# Altium PCB ADCSHub.PcbDoc
Units mil, origin at the board's own origin, x right, y up, seen from the top; angles counter-clockwise.
Board outline 3625 x 3400 mil, 2 copper layers (Component Side, Bottom Layer), stack 65.756 mil thick; 31 components, 29 nets, 226 pads, 47 vias.
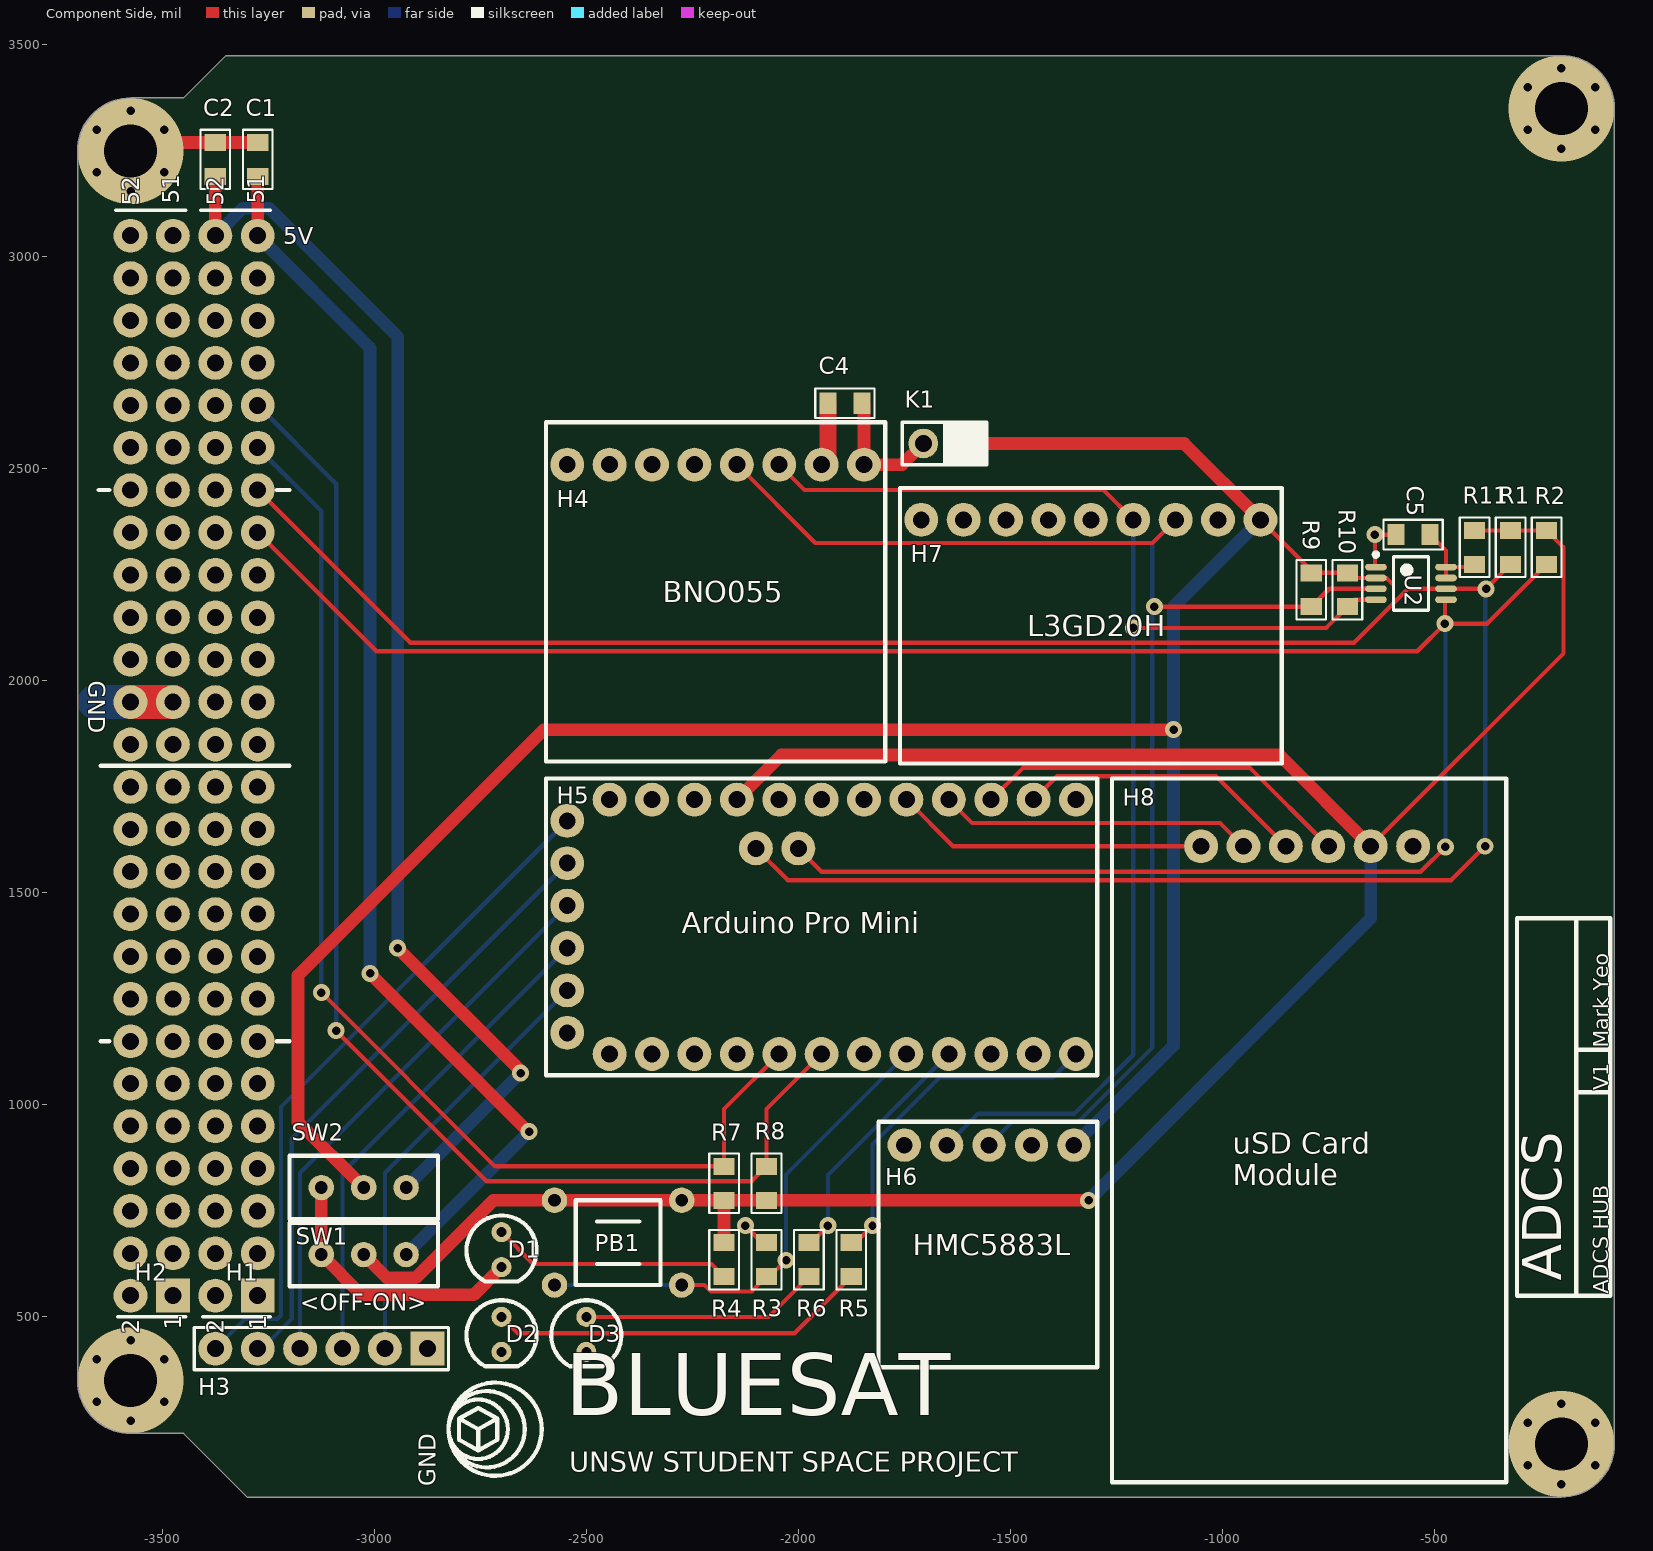
[diagram p0: Component Side view]
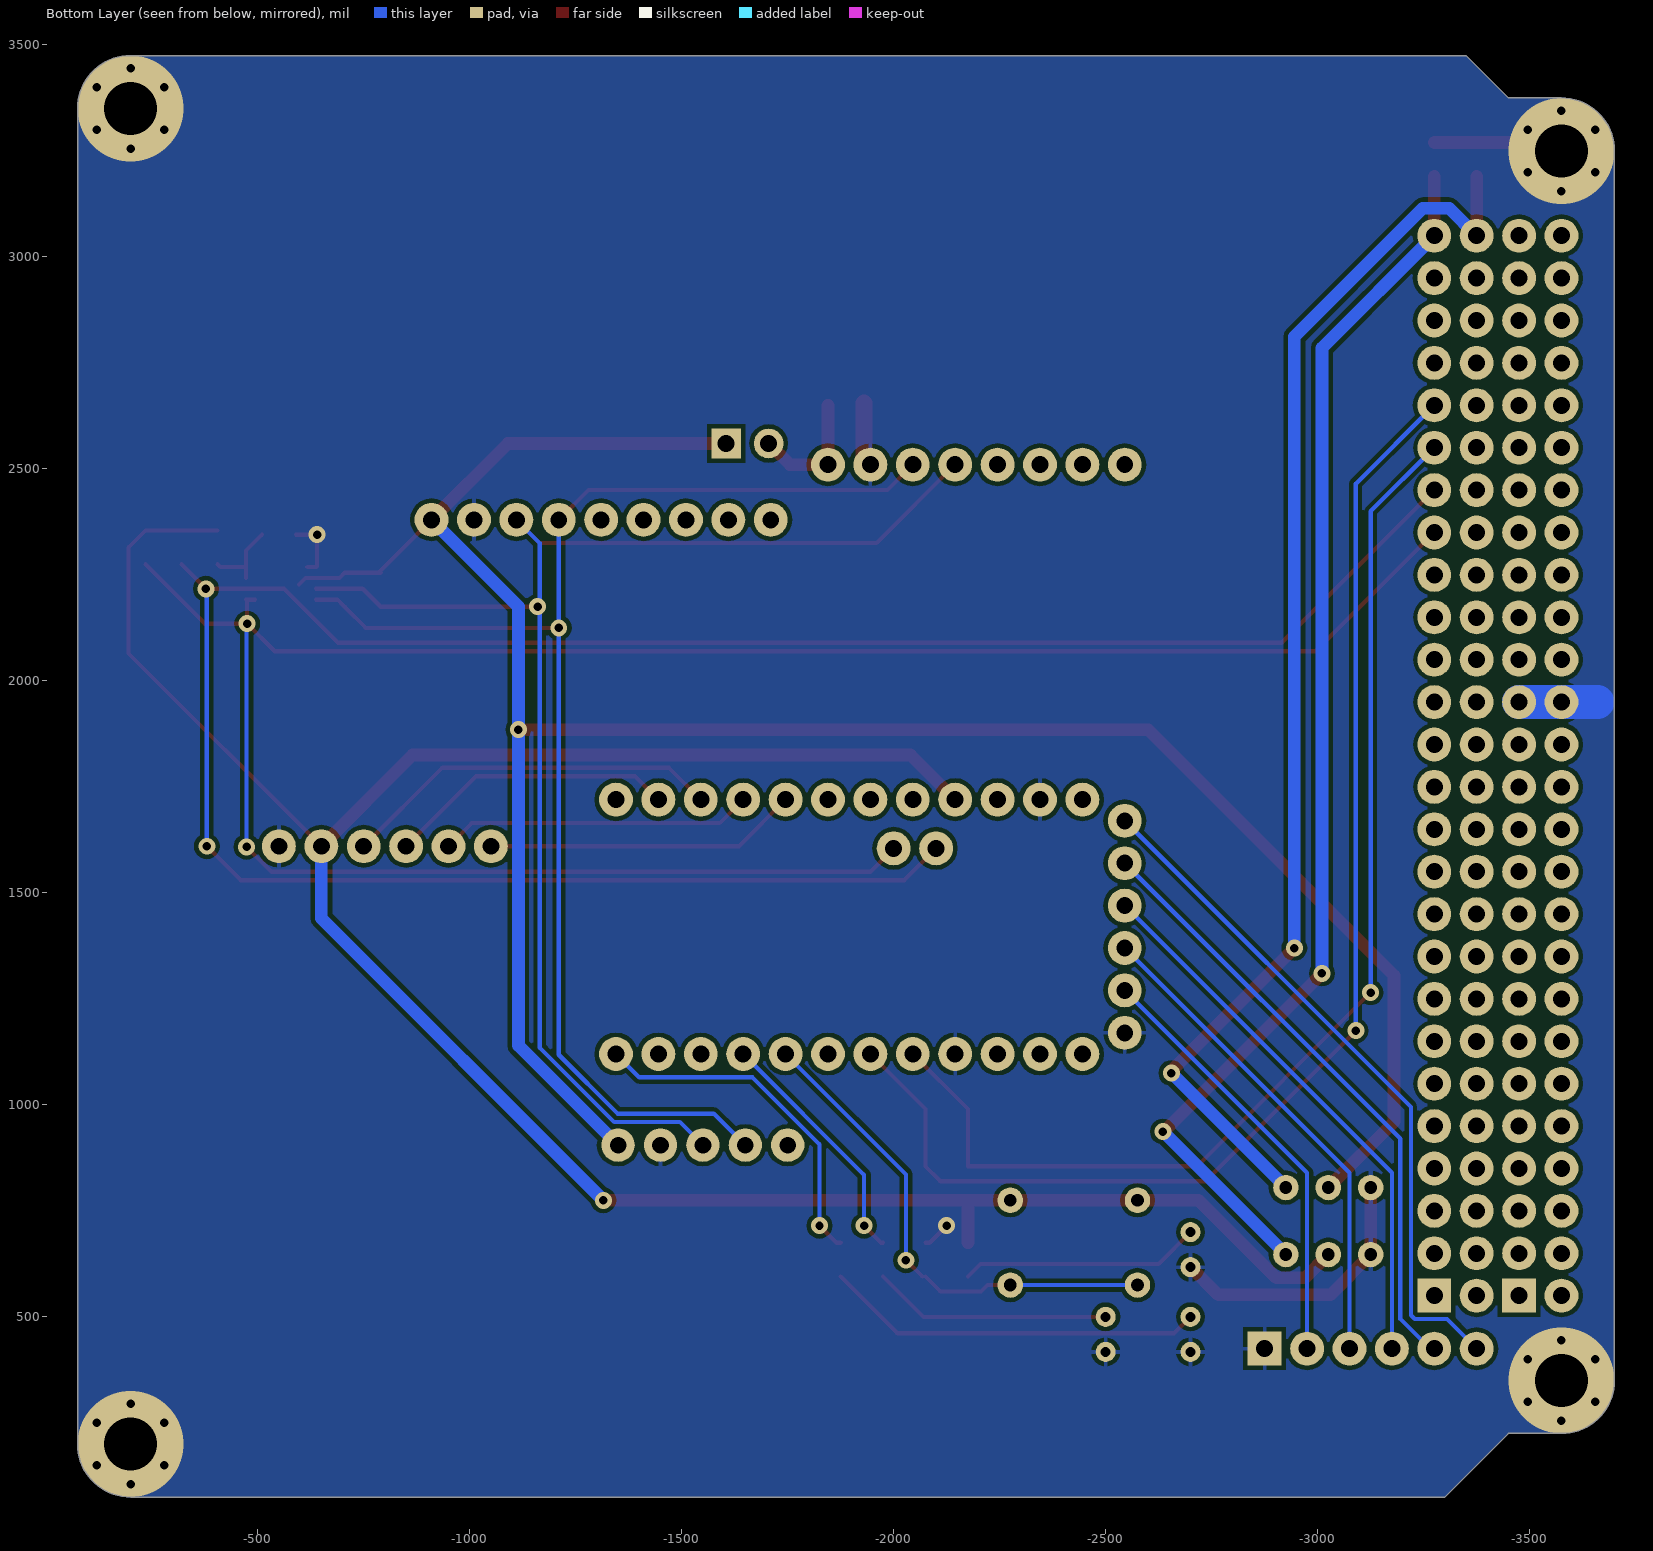
[diagram p1: Bottom Layer view, seen from below]

## Layer stack, top to bottom
Top Solder: solder mask 0.394, Solder Resist, Dk 3.5
Component Side: signal copper 1.378
Dielectric 1: core 63, FR-4, Dk 4.2
Bottom Layer: signal copper 1.378
Solder Side: solder mask 0.394, Solder Resist, Dk 3.5

## Board outline
-3575,225 cw(c-3575,350) -3700,350 -3700,3250 cw(c-3575,3250) -3575,3375 -3450,3375 -3350,3475 -200,3475 cw(c-200,3350) -75,3350 -75,200 cw(c-200,200) -200,75 -3300,75 -3450,225

## Design rules (kind name [scope] priority, off if disabled: settings)
Clearance [All] p1: gap=10
Clearance "Clearance (Same Net)" [All] p2: gap=0 except(8: SMDPad-SMDPad SMDPad-THPad SMDPad-Via)
ComponentClearance [All] p1: gap=0 collisioncheckmode=3 verticalgap=0 showdistances=FALSE
HoleSize HoleSize_1 [All] p1: absolutevalues=TRUE maxlimit=100000 minlimit=24 maxpercent=80.000 minpercent=20.000
HoleSize [All] p2: absolutevalues=TRUE maxlimit=100 minlimit=1 maxpercent=80.000 minpercent=20.000
HoleToHoleClearance mdViaViaSameLayer [All] p1: gap=8 allowstackedmicrovias=TRUE
HoleToHoleClearance [All] p2: gap=10 allowstackedmicrovias=TRUE
PasteMaskExpansion mlMinCreamFrame [All] p1: expansion=0
PasteMaskExpansion [All] p2: expansion=0
PlaneConnect PlaneConnect_1 [All] p1: planeconnectstyle=Relief reliefexpansion=20 reliefentries=4 reliefconductorwidth=10 reliefairgap=10
PlaneConnect PlaneConnect_2 [IsVia AND InNet('GND')] p2: planeconnectstyle=Direct reliefexpansion=20 reliefentries=4 reliefconductorwidth=10 reliefairgap=10
PolygonConnect ThermalVias [IsVia] p1: connectstyle=Direct reliefconductorwidth=10 reliefentries=4 polygonreliefangle="90 Angle" airgapwidth=10
PolygonConnect [All] p2: connectstyle=Relief reliefconductorwidth=10 reliefentries=4 polygonreliefangle="90 Angle" airgapwidth=10
RoutingVias [All] p1: holewidth=28 width=50 viastyle="Through Hole" minholewidth=28 minwidth=50 maxholewidth=28 maxwidth=50
SilkToSilkClearance [All] p1 off: silktosilkclearance=10
SilkToSolderMaskClearance [IsPad] p1 off: minsilkscreentomaskgap=10 clearancetoexposedcopper=TRUE
SolderMaskExpansion mlMinStopFrame [All] p1: expansion=4
SolderMaskExpansion [All] p2: expansion=4
Width Width_1 [All] p1: maxlimit=100000 minlimit=6 preferedwidth=10
Width [All] p2: maxlimit=10 minlimit=8 preferedwidth=10
23 further rules are at their usual default settings.

## Components (designator, comment, footprint, x,y, rotation, side; value= is the part's Value field where it differs from the comment)
C1 "100nF" 0805C-TBD -3275,3200 r90 top
C2 "100nF" 0805C-TBD -3375,3200 r90 top
C4 "10uF" 0805C-GENERIC -1860,2655 r180 top
C5 "10uF" 0805C-GENERIC -520,2345 r180 top
D1 "LED" LED -2700,700 r0 top
D2 "LED" LED -2700,500 r0 top
D3 "LED" LED -2500,500 r0 top
H1 "26X2 Header" "26X2 Header" -3275,550 r90 top
H2 "26X2 Header" "26X2 Header" -3475,550 r90 top
H3 "Header 6" HDR1X6 -2875,425 r180 top
H4 "BNO055" BNO055 -1845,2510 r270 top
H5 "Arduino Pro Mini" "Arduino Pro Mini" -2445,1120 r90 top
H6 "HMC5883L" HMC5883L -1350,905 r270 top
H7 "L3GD20H" L3GD20H -910,2380 r270 top
H8 "uSD Card Module" "uSD Card Module" -1050,1610 r90 top
K1 "HEADER-1X2" HEADER-1X2 -1605,2560 r270 top
PB1 "PushButton" PushButton -2575,575 r0 top
R1 "4K7" 0805R-4K7 -320,2345 r270 top
R2 "4K7" 0805R-4K7 -235,2345 r270 top
R3 "4K7" 0805R-4K7 -2075,605 r90 top
R4 "150R" 0805R-150 -2175,665 r270 top
R5 "150R" 0805R-150 -1875,665 r270 top
R6 "150R" 0805R-150 -1975,665 r270 top
R7 "4K7" 0805R-4K7 -2175,785 r90 top
R8 "4K7" 0805R-4K7 -2075,785 r90 top
R9 "4K7" 0805R-4K7 -790,2245 r270 top
R10 "4K7" 0805R-4K7 -705,2245 r270 top
R11 "200K" 0805R-4K7 -405,2285 r90 top
SW1 "ToggleSwitch" SWITCHFOOTPRINT -2925,647 r90 top
SW2 "ToggleSwitch" SWITCHFOOTPRINT -2925,805 r90 top
U2 "PCA9306" PCA9306 -555,2230 r0 top

## Footprints (in the part's own frame and the unit in brackets; to place one, negate y for a bottom-side part, rotate by r counter-clockwise, add the part's x,y. Pads: shape width x height; smd on the part's side, far side on the other; paste and mask are expansions set on the pad)
"26X2 Header" [mil]
  rect 80x80 hole 40: 1(0,0)
  round 80 hole 40: 2(0,100) 3(100,0) 4(100,100) 5(200,0) 6(200,100) 7(300,0) 8(300,100) 9(400,0) 10(400,100) 11(500,0) 12(500,100) 13(600,0) 14(600,100) 15(700,0) 16(700,100) 17(800,0) 18(800,100) 19(900,0) 20(900,100) 21(1000,0) 22(1000,100) 23(1100,0) 24(1100,100) 25(1200,0) 26(1200,100) 27(1300,0) 28(1300,100) 29(1400,0) 30(1400,100) 31(1500,0) 32(1500,100) 33(1600,0) 34(1600,100) 35(1700,0) 36(1700,100) 37(1800,0) 38(1800,100) 39(1900,0) 40(1900,100) 41(2000,0) 42(2000,100) 43(2100,0) 44(2100,100) 45(2200,0) 46(2200,100) 47(2300,0) 48(2300,100) 49(2400,0) 50(2400,100) 51(2500,0) 52(2500,100)
  silkscreen extent -50,-30 2560,135, body extent -55,-47 2555,150, height 335
0805C-GENERIC [mil] "CAPACITOR 0805"
  rect 40x50 smd: 1(-10,0) 2(70,0)
  silkscreen extent -40,-35 100,35, body extent -11,-25 70,25, height 26
0805C-TBD [mil] "CAPACITOR 0805"
  rect 40x50 smd: 1(-10,0) 2(70,0)
  silkscreen extent -40,-35 100,35, body extent -11,-25 70,25, height 26
0805R-4K7 [mil] "RESISTOR 0805"
  rect 40x50 smd: 1(-10,0) 2(70,0)
  silkscreen extent -40,-35 100,35, body extent -11,-25 70,25, height 27
0805R-150 [mil] "RESISTOR 0805"
  rect 40x50 smd: 1(-10,0) 2(70,0)
  silkscreen extent -40,-35 100,35, body extent -11,-25 70,25, height 27
"Arduino Pro Mini" [mil]
  round 80 hole 40: 1(0,0) 2(0,-100) 3(0,-200) 4(0,-300) 5(0,-400) 6(0,-500) 7(0,-600) 8(0,-700) 9(0,-800) 10(0,-900) 11(0,-1000) 12(0,-1100) 13(600,0) 14(600,-100) 15(600,-200) 16(600,-300) 17(600,-400) 18(600,-500) 19(600,-600) 20(600,-700) 21(600,-800) 22(600,-900) 23(600,-1000) 24(600,-1100) 25(485,-345) 26(485,-445) 27(50,100) 28(150,100) 29(250,100) 30(350,100) 31(450,100) 32(550,100)
  silkscreen extent -50,-1150 650,150
BNO055 [mil]
  round 80 hole 40: 1(0,0) 2(0,-100) 3(0,-200) 4(0,-300) 5(0,-400) 6(0,-500) 7(0,-600) 8(0,-700)
  silkscreen extent -100,-750 700,50
HDR1X6 [mil] "Connector; Header; 6 Position"
  rect 80x80 hole 40: 1(0,0)
  round 80 hole 40: 2(100,0) 3(200,0) 4(300,0) 5(400,0) 6(500,0)
  silkscreen extent -50,-50 550,50
HEADER-1X2 [mil]
  rect 70x70 hole 40: 1(0,0)
  round 70 hole 40: 2(0,-100)
  silkscreen extent -50,-150 50,50, body extent -50,-150 50,50, height 470
HMC5883L [mm]
  round 2 hole 1: 1(0,0) 2(0,-2.54) 3(0,-5.08) 4(0,-7.62) 5(0,-10.16)
  silkscreen extent -1.4,-11.7 13.3,1.4
L3GD20H [mil]
  round 80 hole 40: 1(0,0) 2(0,-100) 3(0,-200) 4(0,-300) 5(0,-400) 6(0,-500) 7(0,-600) 8(0,-700) 9(0,-800)
  silkscreen extent -75,-850 575,50
LED [mm]
  round 1.2 hole 0.6: 1(0,0) 2(0,-2.1)
  silkscreen extent -2.1,-2.96 2.1,1
PCA9306 [mm] "Dual Bidirectional I2C Voltage Shifter"
  oval 1.3x0.4 smd: 1(-2.1,0.975) 2(-2.1,0.325) 3(-2.1,-0.325) 4(-2.1,-0.975) 5(2.1,-0.975) 6(2.1,-0.325) 7(2.1,0.325) 8(2.1,0.975)
  silkscreen extent -2.22,-1.6 1.05,1.85, body extent -2,-1.6 2,1.6, height 1.4
PushButton [mil]
  round 60 hole 30: 5(0,0) 6(300,0) 7(0,200) 8(300,200)
  silkscreen extent 50,0 250,200, body extent 50,0 250,200, height 300
SWITCHFOOTPRINT [mil]
  round 60 hole 30: 2(0,0) 3(0,100) 4(0,200)
  silkscreen extent -75,-75 75,275, body extent -75,-75 75,275, height 300
"uSD Card Module" [mil]
  round 80 hole 40: 1(0,0) 2(0,-100) 3(0,-200) 4(0,-300) 5(0,-400) 6(0,-500)
  silkscreen extent -1500,-720 160,210

## Part data
C1 C2: library part 0805C-100nF-25V-X7R-MUR, "CAPACITOR 0805 CERAMIC"
C4 C5: library part 0805C-10UF-16V-X5R-TDK, "CAPACITOR 0805 CERAMIC"
D1 D2 D3: "Small LED"
H3: "Header, 6-Pin"
H4: "Accel+Gyro+Mag"
H6: "Magnetometer"
H7: "Gyroscope"
R1 R2 R3 R7 R8 R9 R10 R11: library part 0805R-4K7, "RESISTOR 0805 1/4 WATT THIN FILM"
R4 R5 R6: library part 0805R-150, "RESISTOR 0805 1/4 WATT THIN FILM"
U2: "Dual Bidirectional I2C Voltage Level Translator"

## Via types
v1: diameter 40, hole 20, Component Side to Bottom Layer, 43 vias
v2: diameter 250, hole 125, Component Side to Bottom Layer, 4 vias

## Nets (pads, with @x,y where several pads share a name; then routed paths per layer and width w, separated by ;. In a path a pad name is that pad's centre, name@x,y a point inside that pad or via, vN(x,y) a via of type N, cw(c..) or ccw(c..) an arc to the next point about the centre after c; other vN are vias at no path point)
3V3: H6.1 H7.1 K1.1 R9.1 R10.1 SW2.3 U2.2 | length 5677.5
  Component Side w10: H7.1 R9.1@-785,2255 ; R9.1 R10.1 -692.8,2242.8 U2.2 -612.8,2242.8 -597.09,2227.09
  Component Side w30: SW2.3 -3180,960 -3180,1305 -2600,1885 v1(-1115,1885) ; K1.1 -1090,2560 H7.1
  Bottom Layer w30: H6.1 -1115,1140 -1115,2175 H7.1
3V3_IN: C2.1 H1.52 SW2.2 | length 2963.4
  Component Side w30: H1.52 C2.1 ; v1(-2945,1370) v1@-2650,1075
  Bottom Layer w30: H1.52 -3310,3115 -3248.08,3115 -2945,2811.92 v1(-2945,1370) ; SW2.2 v1(-2655,1075)
5V_IN: C1.1 H1.51 SW1.2 | length 2923.1
  Component Side w30: H1.51 C1.1 ; v1(-3010,1310) v1@-2640,940
  Bottom Layer w30: H1.51 -3010,2785 v1(-3010,1310) ; SW1.2 v1(-2635,937)
CSUSD: H5.20 H8.1 | length 740.6
  Component Side w10: H5.20 -1635,1610 H8.1
EXTCLK: H5.17
GND: C1.2 C2.2 C4.2 C5.2 D1.2 D2.2 D3.2 H2.29 H2.30 H3.1 H4.2 H5.4 H5.14 H5.27 H6.2 H7.2 H8.6 R3.2 SW1.4 SW2.4 U2.1 | length 1577.5
  Component Side w10: v1(-2125,715) -2085,675 R3.2 ; U2.1@-640,2270.71 v1(-640,2345) C5.2 ; U2.1 U2.1@-616.61,2268.39
  Component Side w30: v2@-3555,3270 C2.2 C1.2 ; SW2.4 SW1.4 -3030,552 -2765.32,552 D1.2
  Component Side w40: H4.2 -1930,2525 C4.2
  Component Side w80: H2.30 H2.29
  Bottom Layer w80: -3660,1950 H2.30 H2.29
  other v1: -200,105 -280,150 -120,150 -280,250 -120,250 -3575,255 -200,295 -3655,300 -3495,300 -3655,400 -3495,400 -3575,445 -3575,3155 -3655,3200 -3495,3200 -200,3255 -3655,3300 -3495,3300 -280,3300 -120,3300 -3575,3345 -280,3400 -120,3400 -200,3445
  other v2: -200,200 -3575,350 -3575,3250 -200,3350
LED_G: H5.9 R6.1 | length 584.6
  Component Side w10: R6.1 -1970,675 v1(-1930,715)
  Bottom Layer w10: v1(-1930,715) -1930,835 H5.9
LED_Y: H5.12 R5.1 | length 826.7
  Component Side w10: R5.1 -1865,675 v1(-1825,715)
  Bottom Layer w10: v1(-1825,715) -1825,906.89 -1666.89,1065 -1400,1065 H5.12
MISO: H5.22 H8.4 | length 902.7
  Component Side w10: H5.22 -1470,1795 -935,1795 H8.4
MOSI: H5.23 H8.3 | length 686.1
  Component Side w10: H5.23 -1390,1775 -1015,1775 H8.3
NetC4_1: C4.1 H4.1 K1.2 | length 300.7
  Component Side w30: C4.1@-1845,2650 H4.1 -1755,2510 K1.2
NetC5_1: C5.1 R11.1 U2.7 U2.8 | length 187.9
  Component Side w10: C5.1 -472.32,2307.32 U2.8 ; U2.7 U2.8 ; R11.1 -411.61,2268.39 U2.8
NetD1_1: D1.1 R4.2 | length 568.5
  Component Side w10: D1.1 -2625,625 -2205,625 R4.2
NetD2_1: D2.1 R5.2 | length 896.3
  Component Side w10: D2.1 -2661.38,461.38 -2008.62,461.38 R5.2
NetD3_1: D3.1 R6.2 | length 564.4
  Component Side w10: D3.1 -2070,500 R6.2
NetH3_2: H3.2 H5.28 | length 1023.1
  Bottom Layer w10: H3.2 -2975,840 H5.28
NetH3_3: H3.3 H5.29 | length 1164.5
  Bottom Layer w10: H3.3 -3075,840 H5.29
NetH3_4: H3.4 H5.30 | length 1306
  Bottom Layer w10: H3.4 -3175,840 H5.30
NetH3_5: H3.5 H5.31 | length 1453.2
  Component Side w10: H3.5 H3.5@-3265,425
  Bottom Layer w10: H3.5@-3265,425 -3195,495 -3195,920 H5.31
NetH3_6: H3.6 H5.32 | length 1633.4
  Bottom Layer w10: H3.6 -3305,495 -3228.79,495 -3220,503.79 -3220,995 H5.32
PUSH_BUTTON: H5.8 PB1.5 PB1.6 R3.1 | length 1179.3
  Component Side w10: PB1.6 -2221.21,575 -2206.21,560 -2110,560 R3.1 ; R3.1@-2067.57,595 v1(-2028.99,633.59)
  Bottom Layer w10: PB1.5 PB1.6 ; v1(-2028.99,633.59) -2028.99,836.01 H5.8
SCK: H5.21 H8.2 | length 740.6
  Component Side w10: H5.21 -1590,1665 -1005,1665 H8.2
SCL: H1.39 H5.25 R1.2 U2.6 | length 5577
  Component Side w10: H1.39@-3270,2455 H1.39 -2915,2090 -689.23,2090 -562.02,2217.2 U2.6 v1(-377.8,2217.2) R1.2 ; H5.25 -2025,1530 -460,1530 v1(-380,1610)
  Bottom Layer w10: v1(-380,1610) v1@-380,2215
SCL_3V3: H4.4 H6.3 H7.3 R9.2 U2.3 | length 3447.3
  Component Side w10: H4.4@-2145,2535 H4.4 -1960,2325 -1165,2325 H7.3 ; v1(-1160,2175) R9.2 -747.8,2217.2 U2.3
  Bottom Layer w10: H6.3 -1495.63,959.37 -1340.63,959.37 -1165,1135 -1165,2325 H7.3
SCL_EXT: H1.43 H5.6 R8.2 | length 3047
  Component Side w10: v1(-3090,1175) -2735,820 -2110,820 R8.2 -2075,990 H5.6
  Bottom Layer w10: H1.43 -3090,2465 v1(-3090,1175)
SDA: H1.37 H5.26 R2.2 U2.5 | length 5406.8
  Component Side w10: H1.37 -2995,2070 -540,2070 v1(-475,2135) ; H5.26 -1945,1550 -532.22,1550 v1(-473.61,1608.61) ; U2.5@-493.39,2191.61 U2.5 ; U2.5@-475,2188.94 v1(-475,2135) ; R2.2 -375,2135 v1(-475,2135)
  Bottom Layer w10: v1(-473.61,1608.61) v1@-473.61,2126.04
SDA_3V3: H4.3 H6.4 H7.4 R10.2 U2.4 | length 3278.8
  Component Side w10: H4.3 -1985,2450 -1280,2450 H7.4 ; v1(-1210,2125) -755,2125 R10.2 -688.39,2191.61 U2.4
  Bottom Layer w10: H6.4 -1575.63,979.37 -1348.91,979.37 -1210,1118.28 H7.4
SDA_EXT: H1.41 H5.5 R7.2 | length 2785.8
  Component Side w10: v1(-3125,1265) -2715,855 R7.2 -2175,990 H5.5
  Bottom Layer w10: H1.41 -3125,2400 v1(-3125,1265)
VCC: H5.16 H8.5 PB1.7 PB1.8 R1.1 R2.1 R4.1 R7.1 R8.1 R11.2 SW1.3 | length 5766.6
  Component Side w10: H8.5 -195,2065 -195,2315 R2.1 R1.1 R11.2
  Component Side w30: SW1.3 -2970,592 -2902.22,592 -2719.22,775 PB1.7 PB1.8 R7.1 ; R4.1 R7.1 ; H5.16 -2040,1825 -865,1825 H8.5 ; v1(-1315,775) R8.1 R7.1
  Bottom Layer w30: v1(-1315,775) -650,1440 H8.5
pads on no net: H1.1 H1.2 H1.3 H1.4 H1.5 H1.6 H1.7 H1.8 H1.9 H1.10 H1.11 H1.12 H1.13 H1.14 H1.15 H1.16 H1.17 H1.18 H1.19 H1.20 H1.21 H1.22 H1.23 H1.24 H1.25 H1.26 H1.27 H1.28 H1.29 H1.30 H1.31 H1.32 H1.33 H1.34 H1.35 H1.36 H1.38 H1.40 H1.42 H1.44 H1.45 H1.46 H1.47 H1.48 H1.49 H1.50 H2.1 H2.2 H2.3 H2.4 H2.5 H2.6 H2.7 H2.8 H2.9 H2.10 H2.11 H2.12 H2.13 H2.14 H2.15 H2.16 H2.17 H2.18 H2.19 H2.20 H2.21 H2.22 H2.23 H2.24 H2.25 H2.26 H2.27 H2.28 H2.31 H2.32 H2.33 H2.34 H2.35 H2.36 H2.37 H2.38 H2.39 H2.40 H2.41 H2.42 H2.43 H2.44 H2.45 H2.46 H2.47 H2.48 H2.49 H2.50 H2.51 H2.52 H4.5 H4.6 H4.7 H4.8 H5.1 H5.2 H5.3 H5.7 H5.10 H5.11 H5.13 H5.15 H5.18 H5.19 H5.24 H6.5 H7.5 H7.6 H7.7 H7.8 H7.9

## Polygon pours and split planes (outlines as drawn)
GND on Bottom Layer "Bottom Layer-GND" (solid, pour order 7): -3575,225 cw(c-3575,350) -3700,350 -3700,3250 cw(c-3575,3250) -3575,3375 -3450,3375 -3350,3475 -200,3475 cw(c-200,3350) -75,3350 -75,200 cw(c-200,200) -200,75 -3300,75 -3450,225

## Silkscreen, mask and mechanical layers (free items; w line width, h text height)
Top Overlay:
  circle w10: c-2715,235 r110
  circle w10: c-2735,235 r90
  circle w10: c-2755,235 r70
  lines w10: -3650,2450 -3625,2450 ; -3645,1150 -3625,1150 ; -3645,1800 -3200,1800 ; -3230,1150 -3200,1150 ; -3230,2450 -3200,2450 ; -165,550 -165,1440 ; -165,1030 -85,1030 ; -165,1130 -85,1130 ; -2800,260 -2755,285 -2710,260 ; -2800,260 -2800,210 -2755,185 ; -2800,260 -2755,235 ; -2755,185 -2710,210 -2710,260 ; -2755,185 -2755,235 ; -2755,235 -2710,260 ; -305,550 -305,1440 -85,1440 -85,550 -305,550
  text "5V" at -3215,3030 h40
  text "GND" at -3675,2000 h40 r270
  text "Mark Yeo" at -90,1135 h35 r90
  text "V1" at -90,1035 h35 r90
  text "ADCS" at -170,585 h157.48 r90
  text "ADCS HUB" at -90,555 h35 r90
  text "<OFF-ON>" at -3175,515 h40
  text "BLUESAT" at -2550,220 h250
  text "UNSW STUDENT SPACE PROJECT" at -2540,135 h47.24
  text "GND" at -2855,100 h40 r90
Mechanical 13:
  lines w10: -3700,350 ccw(c-3575,350) -3575,225 -3500,225 -3450,225 -3300,75 -200,75 ccw(c-200,200) -75,200 -75,3350 ccw(c-200,3350) -200,3475 -3350,3475 -3450,3375 -3500,3375 -3575,3375 ccw(c-3575,3250) -3700,3250 -3700,350

## Text inside footprints (layer, text, board x,y; h text height)
H1: Top Overlay "2" at -3355,460.16 h40 r90; Top Overlay "1" at -3255,470.16 h40 r90; Top Overlay "51" at -3260,3125.16 h40 r90; Top Overlay "52" at -3355,3120.16 h40 r90
H2: Top Overlay "2" at -3555,460.16 h40 r90; Top Overlay "1" at -3455,470.16 h40 r90; Top Overlay "51" at -3460,3125.16 h40 r90; Top Overlay "52" at -3555,3120.16 h40 r90
H8: Top Overlay "uSD Card / Module" at -975,810 h50